# EAGLE board Control board V4 (EAGLE 8.2.1)

Size 68.58 x 53.34 mm. Coordinates in mm from the lower left corner, seen from the top.
Outline: 0,53.34 0,0 66.04,0 66.04,2.54 68.58,5.08 68.58,38.1 66.04,40.64 66.04,52.07 64.77,53.34 0,53.34
Copper layers (1*16): Top 0.035mm / dielectric 1.5mm / Bottom 0.035mm
Design rules "Othermill-DRC-1-64 *": minimum track width 15mil, minimum drill 0.8mm, track to track 0.39878125mm, track to pad 0.39878125mm, pad to pad 0.39878125mm, via to via 0.39878125mm, smd to smd 0mil, copper to edge 0mil, drill to drill 1mil, minimum pad ring 10mil, minimum via ring 10mil, stop-mask expansion 1mil, vias tented up to drill 30mil, thermal gap 10mil

## Footprints (pad centres in the part's own frame; a part is rotated, then mirrored left to right if it is on the bottom)
1X04-BIG = drill 1.016 pad 1.778: 1 0,0; 2 2.54,0; 3 5.08,0; 4 7.62,0
2X20 = drill 1.016 pad 1.88: 1 0,0; 2 0,2.54; 3 2.54,0; 4 2.54,2.54; 5 5.08,0; 6 5.08,2.54; 7 7.62,0; 8 7.62,2.54; 9 10.16,0; 10 10.16,2.54; 11 12.7,0; 12 12.7,2.54; 13 15.24,0; 14 15.24,2.54; 15 17.78,0; 16 17.78,2.54; 17 20.32,0; 18 20.32,2.54; 19 22.86,0; 20 22.86,2.54; 21 25.4,0; 22 25.4,2.54; 23 27.94,0; 24 27.94,2.54; 25 30.48,0; 26 30.48,2.54; 27 33.02,0; 28 33.02,2.54; 29 35.56,0; 30 35.56,2.54; 31 38.1,0; 32 38.1,2.54; 33 40.64,0; 34 40.64,2.54; 35 43.18,0; 36 43.18,2.54; 37 45.72,0; 38 45.72,2.54; 39 48.26,0; 40 48.26,2.54
1X03 = drill 1.016 pad 1.88: 1 0,0; 2 2.54,0; 3 5.08,0
AXIAL-0.3 = drill 0.9 pad 1.88: P$1 -3.81,0; P$2 3.81,0
ARDUINO-BPLACE = drill 1 pad 1.676 octagon: 3V 35.56,2.54; 5V 38.1,2.54; A0 50.8,2.54; A1 53.34,2.54; A2 55.88,2.54; A3 58.42,2.54; A4 60.96,2.54; A5 63.5,2.54; AREF 23.876,50.8; D0 63.5,50.8; D1 60.96,50.8; D2 58.42,50.8; D3 55.88,50.8; D4 53.34,50.8; D5 50.8,50.8; D6 48.26,50.8; D7 45.72,50.8; D8 41.656,50.8; D9 39.116,50.8; D10 36.576,50.8; D11 34.036,50.8; D12 31.496,50.8; D13 28.956,50.8; GND 26.416,50.8; GND1 43.18,2.54; GND2 40.64,2.54; RESET 33.02,2.54; VIN 45.72,2.54 | hole 3.2: 15.24,50.8; 66.04,35.56; 13.97,2.54

## Placement (x,y rotation side)
CN1  1X4-BIG  [1X04-BIG]  64.77,12.7 90 top
J1  RASPBERRYPI-40-PIN-GPIO_PTH_NO_SHROUD  [2X20]  15.24,29.21 0 top
J5  [1X03]  49.53,40.64 0 top
J6  [1X03]  22.86,40.64 180 top
J7  [1X03]  39.37,40.64 180 top
R4  10k  [AXIAL-0.3]  45.72,21.59 270 top
R5  10k  [AXIAL-0.3]  25.4,21.59 270 top
R6  10k  [AXIAL-0.3]  35.56,21.59 270 top
R7  1k  [AXIAL-0.3]  52.07,10.16 90 top
R8  1k  [AXIAL-0.3]  40.64,10.16 90 top
R9  1k  [AXIAL-0.3]  30.48,10.16 90 top
U$1  ARDUINO-BPLACE  [ARDUINO-BPLACE]  0,0 0 top

## Library data of the parts
CN1 U$1 = adafruit
J1 J5-J7 = SparkFun-Connectors
R4-R6 = SparkFun-Resistors; PROD_ID: RES-12183
R7-R9 = SparkFun-Resistors; PROD_ID: RES-12182

## Nets
3.3V: J1.1 J1.17
3V: U$1.3V
5V: J1.2 J1.4 U$1.5V
GND: CN1.1 J1.6 J1.9 J1.14 J1.20 J1.25 J1.30 J1.34 J1.39 J5.3 J6.3 J7.3 R7.P$2 R8.P$2 R9.P$2 U$1.GND
GND1: U$1.GND1
GND2: U$1.GND2
N$1: J1.5 U$1.A4
N$2: J7.1 U$1.D10
N$3: J6.1 U$1.D11
N$4: R4.P$2 R7.P$1 U$1.A3
N$5: R6.P$2 R8.P$1 U$1.A2
N$6: CN1.3 R5.P$1
N$7: CN1.2 R6.P$1
N$8: J5.1 U$1.D9
N$9: J1.3 U$1.A5
N$10: CN1.4 R4.P$1
N$11: R5.P$2 R9.P$1 U$1.A1
VIN: U$1.VIN

## Tracks (layer width: path | path; a pad name or v marks a point on that pad's centre or on a via)
3.3V  (1 unrouted)
5V  (2 unrouted)
GND  (15 unrouted)
N$1  (1 unrouted)
N$2  (1 unrouted)
N$3  (1 unrouted)
N$4  (2 unrouted)
N$5  (2 unrouted)
N$6  (1 unrouted)
N$7  (1 unrouted)
N$8  (1 unrouted)
N$9  (1 unrouted)
N$10  (1 unrouted)
N$11  (2 unrouted)